# Altium PCB 板3.PcbDoc (part 3 of 3)
Units mm, origin at the board's own origin, x right, y up, seen from the top; angles counter-clockwise.
Board outline 152.4 x 101.6 mm, 4 copper layers (Top Layer, VCC, GND, Bottom Layer); 152 components, 486 nets, 1233 pads, 480 vias.
Unrouted connection lines stored in the file: 1.
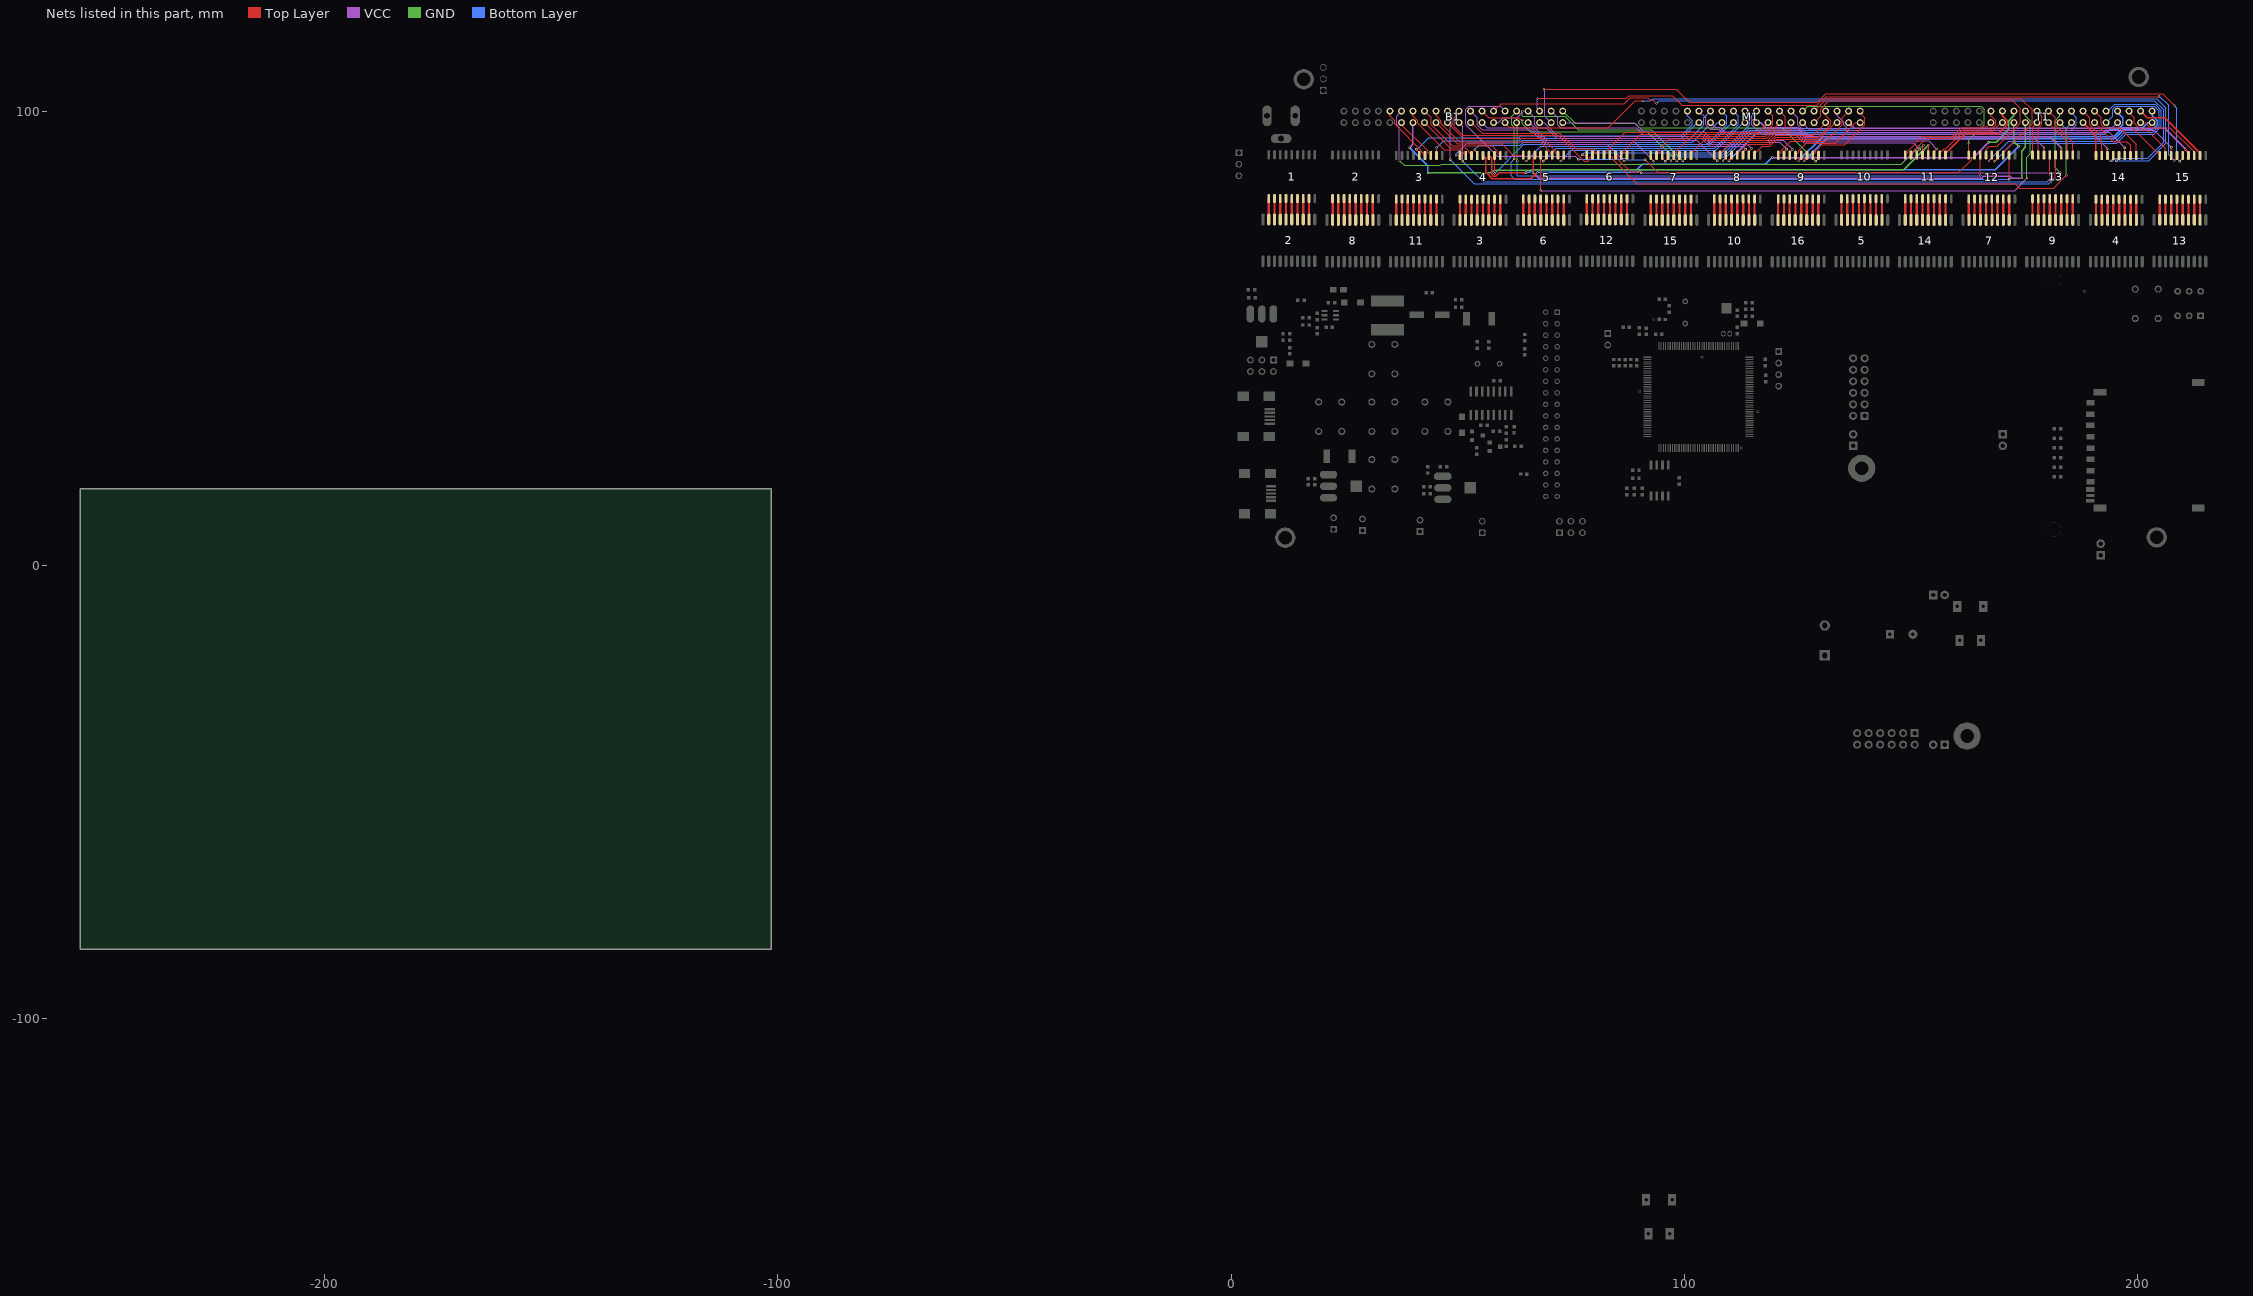
[diagram p5: the nets of this part, all layers, seen from the top]

## Via types
v1: diameter 0.5, hole 0.3, Top Layer to Bottom Layer, 465 vias
v2: diameter 3, hole 3, Top Layer to Bottom Layer, tented both sides, 6 vias
v3: diameter 1.27, hole 1.016, Top Layer to Bottom Layer, 4 vias
v4: diameter 1, hole 1, Top Layer to Bottom Layer, 4 vias
v5: diameter 0.8, hole 0.5, Top Layer to Bottom Layer, 1 vias

## Nets (pads, with @x,y where several pads share a name; then routed paths per layer and width w, separated by ;. In a path a pad name is that pad's centre, name@x,y a point inside that pad or via, vN(x,y) a via of type N, cw(c..) or ccw(c..) an arc to the next point about the centre after c; other vN are vias at no path point) (continued)
W29: 3.14@41.478,90.348 M1.25 | length 68.2
  Top Layer w0.254: v1(40.843,91.669) 41.478,91.034 3.14@41.478,90.348
  Bottom Layer w0.254: v1(40.843,91.669) 41.046,91.669 43.561,94.183 63.37,94.183 63.815,94.628 99.233,94.628 101.716,97.11 101.716,98.012 100.627,99.101 M1.25@100.627,100.101
W30: 3.13@42.748,90.348 B1.25 | length 13
  Top Layer w0.2: B1.25@35.019,100.101 35.019,99.063 36.081,98.001 36.081,97.312 42.083,91.31 42.083,91.013 3.13@42.748,90.348
W31: 3.12@44.018,90.348 B1.6 | length 9.9
  Top Layer w0.254: B1.6@37.559,97.561 37.559,97.142 43.38,91.321 43.38,90.986 3.12@44.018,90.348
W32: 3.11@45.288,90.348 M1.6 | length 61.8
  Top Layer w0.254: 3.11@45.288,90.348 v1(45.288,91.999)
  Bottom Layer w0.254: v1(45.288,91.999) 46.914,93.624 63.453,93.624 64.003,94.174 99.422,94.174 102.809,97.561 M1.6@103.167,97.561
W33: 11.18@148.666,90.424 T1.6 | length 22
  Top Layer w0.254: 11.18@148.666,90.424 149.304,91.062 149.304,91.397 152.459,94.552 159.109,94.552 161.029,96.472 165.467,96.472 165.642,96.647 166.642,96.647 T1.6@167.556,97.561
W34: 11.17@149.936,90.424 T1.26 | length 25.1
  Top Layer w0.254: 11.17@149.936,90.424 150.574,91.062 150.574,91.397 153.275,94.098 159.297,94.098 161.217,96.018 167.553,96.018 168.645,97.11 168.645,98.012 167.556,99.101 T1.26@167.556,100.101
W35: 11.16@151.206,90.424 M1.26 | length 54.6
  Top Layer w0.254: 11.16@151.206,90.424 151.206,91.084 v1(151.841,91.719)
  VCC w0.254: M1.26@103.167,100.101 104.618,98.65 104.618,97.11 105.637,96.091 107.535,96.091 108.562,95.064 124.351,95.064 126.306,93.109 150.452,93.109 v1(151.841,91.719)
W36: 11.15@152.476,90.424 B1.26 | length 131.8
  Top Layer w0.254: 11.15@152.476,90.424 152.476,92.38 v1(152.679,92.583)
  VCC w0.254: v1(37.109,89.129) 37.109,96.471 36.47,97.11 36.47,99.012 B1.26@37.559,100.101
  GND w0.254: v1(37.109,89.129) 38.125,88.113 46.072,88.113 46.395,88.436 147.741,88.436 151.602,92.296 152.393,92.296 v1(152.679,92.583)
W37: 11.14@153.746,90.424 B1.7 | length 128.2
  Top Layer w0.3: 11.14@153.746,90.424 153.746,92.583 v1(153.797,92.634)
  VCC w0.3: v1(39.37,92.05) 40.099,92.778 B1.7@40.099,97.561
  GND w0.3: v1@43.409,86.487 57.394,86.487 58.019,87.112 66.299,87.112 66.35,87.163 68.062,87.163 68.069,87.157 148.32,87.157 v1(153.797,92.634)
  Bottom Layer w0.3: v1(39.37,92.05) 43.409,88.011 v1(43.409,86.462)
W38: 11.13@155.016,90.424 M1.7 | length 53.9
  Top Layer w0.254: 11.13@155.016,90.424 155.016,91.135 v1(155.626,91.745)
  VCC w0.254: M1.7@105.707,97.561 106.723,96.545 107.723,96.545 108.75,95.518 124.539,95.518 126.494,93.563 153.808,93.563 v1(155.626,91.745)
W39: 11.12@156.286,90.424 T1.7 | length 17
  Top Layer w0.254: 11.12@156.286,90.424 156.286,90.759 157.295,91.767 157.629,91.767 161.426,95.564 167.741,95.564 169.738,97.561 T1.7@170.096,97.561
W40: 11.11@157.556,90.424 T1.27 | length 20.1
  Top Layer w0.3: 11.11@157.556,90.424 157.726,90.594 157.726,90.961 161.852,95.087 169.195,95.087 171.208,97.101 171.208,98.022 170.096,99.134 T1.27@170.096,100.101
W41: 4.18@50.47,90.322 M1.27 | length 62.1
  Top Layer w0.254: v1(49.581,90.322) 4.18@50.47,90.322
  Bottom Layer w0.254: v1(49.581,90.322) 49.581,90.576 52.121,93.116 63.587,93.116 64.191,93.72 100.865,93.72 104.256,97.11 104.256,98.65 M1.27@105.707,100.101
W42: 4.17@51.74,90.322 B1.27 | length 16.8
  Top Layer w0.2: B1.27@40.099,100.101 40.099,99.063 41.161,98.001 41.161,97.447 46.969,91.638 50.72,91.638 51.075,91.284 51.075,90.988 4.17@51.74,90.322
W43: 4.16@53.01,90.322 B1.8 | length 13.5
  Top Layer w0.2: B1.8@42.639,97.561 48.162,92.038 51.59,92.038 52.345,91.284 52.345,90.988 4.16@53.01,90.322
W44: 4.15@54.28,90.322 M1.8 | length 58.7
  Top Layer w0.254: v1(53.645,91.592) 54.28,90.957 4.15@54.28,90.322
  Bottom Layer w0.254: v1(53.645,91.592) 54.661,92.608 63.722,92.608 64.379,93.266 101.775,93.266 105.119,96.61 105.256,96.472 106.158,96.472 107.247,97.561 M1.8@108.247,97.561
W45: 4.14@55.55,90.322 T1.8 | length 130.6
  Top Layer w0.3: 4.14@55.55,90.322 56.165,89.707 56.165,86.704 57.634,85.235 66.119,85.235 67.447,86.563 v1(67.488,86.563)
  GND w0.3: T1.8@172.636,97.561 172.636,93.378 v1(173.685,92.329)
  Bottom Layer w0.3: v1(67.488,86.563) 67.513,86.589 89.626,86.589 90.175,87.138 91.018,87.138 91.024,87.132 168.488,87.132 v1(173.685,92.329)
W46: 4.13@56.82,90.322 T1.28 | length 127.5
  Top Layer w0.3: 4.13@56.82,90.322 57.435,89.707 57.435,86.141 57.841,85.735 58.338,85.735 59.116,86.512 v1(64.948,86.512)
  VCC w0.3: v1@119.405,89.865 163.652,89.865 v1(167.056,93.269)
  GND w0.3: v1(167.056,93.269) 168.732,93.269 171.524,96.061 171.524,98.022 172.636,99.134 T1.28@172.636,100.101
  Bottom Layer w0.3: v1(64.948,86.512) 65.1,86.665 65.852,86.665 66.376,87.189 88.213,87.189 88.245,87.157 89.488,87.157 90.688,88.357 117.821,88.357 v1(119.38,89.916)
W47: 4.12@58.09,90.322 M1.28 | length 63.1
  Top Layer w0.254: v1(58.09,86.335) 4.12@58.09,90.322
  Bottom Layer w0.254: v1(58.09,86.335) 64.567,92.812 105.037,92.812 109.336,97.11 109.336,99.012 M1.28@108.247,100.101
W48: 4.11@59.36,90.322 B1.28 | length 21.9
  Top Layer w0.254: B1.28@42.639,100.101 44.09,98.65 44.09,97.11 48.735,92.465 57.551,92.465 58.722,91.295 58.722,90.961 4.11@59.36,90.322
W49: 5.18@64.44,90.399 B1.9 | length 22.2
  Top Layer w0.254: B1.9@45.179,97.561 49.821,92.919 59.637,92.919 62.158,90.399 5.18@64.44,90.399
W50: 5.17@65.71,90.399 M1.9 | length 50.8
  Top Layer w0.254: v1(65.075,89.103) 65.71,89.738 5.17@65.71,90.399
  Bottom Layer w0.254: v1(65.075,89.103) 68.329,92.358 105.226,92.358 110.429,97.561 M1.9@110.787,97.561
W51: 5.16@66.98,90.399 T1.9 | length 125.2
  Top Layer w0.3: v1(66.573,86.538) 66.573,89.992 5.16@66.98,90.399
  VCC w0.3: v1(66.573,86.538) 67.808,85.303 165.501,85.303 165.888,85.69 171.826,85.69 172.172,85.344 v1(174.396,85.344)
  GND w0.3: v1(174.396,85.344) 174.396,91.303 175.176,92.083 T1.9@175.176,97.561
W52: 5.15@68.25,90.399 T1.29 | length 131.7
  Top Layer w0.254: 5.15@68.25,90.399 68.25,82.626 v1(68.301,82.575)
  VCC w0.254: v1(68.301,82.575) 172.774,82.575 175.514,85.315 v1(175.514,85.369)
  GND w0.254: T1.29@175.176,100.101 175.176,99.101 176.265,98.012 176.265,97.11 176.225,97.07 176.225,90.678 175.514,89.967 v1(175.514,85.369)
W53: 5.14@69.52,90.399 M1.29 | length 51.4
  Top Layer w0.254: v1(68.834,89.078) 69.52,89.764 5.14@69.52,90.399
  Bottom Layer w0.254: v1(68.834,89.078) 71.66,91.904 106.669,91.904 111.876,97.11 111.876,99.012 M1.29@110.787,100.101
W54: 5.13@70.79,90.399 B1.29 | length 30.4
  Top Layer w0.2: B1.29@45.179,100.101 45.179,99.063 46.241,98.001 46.241,97.396 50.291,93.346 59.814,93.346 59.816,93.345 68.14,93.345 5.13@70.757,90.729
W55: 5.12@72.06,90.399 B1.10 | length 27.5
  Top Layer w0.254: B1.10@47.719,97.561 51.198,94.082 68.711,94.082 71.422,91.371 71.422,91.037 5.12@72.06,90.399
W56: 5.11@73.33,90.399 M1.10 | length 45.8
  Top Layer w0.254: v1(72.644,89.103) 73.33,89.789 5.11@73.33,90.399
  Bottom Layer w0.254: v1(72.644,89.103) 74.99,91.45 106.858,91.45 112.969,97.561 M1.10@113.327,97.561
W57: 13.18@176.733,90.424 T1.10 | length 7.5
  Top Layer w0.254: 13.18@176.733,90.424 176.733,96.578 T1.10@177.716,97.561
W58: 13.17@178.003,90.424 T1.30 | length 10.5
  Top Layer w0.254: T1.30@177.716,100.101 178.805,99.012 178.805,97.11 178.003,96.308 13.17@178.003,90.424
W59: 13.16@179.273,90.424 M1.30 | length 71.8
  Top Layer w0.254: 13.16@179.273,90.424 v1(179.273,92.024)
  VCC w0.254: M1.30@113.327,100.101 114.778,98.65 114.778,97.11 115.916,95.972 124.727,95.972 126.682,94.017 177.281,94.017 v1(179.273,92.024)
W60: 13.15@180.543,90.424 B1.30 | length 152.3
  Top Layer w0.254: 13.15@180.543,90.424 180.543,86.004 180.746,85.801 v1(180.746,84.48)
  VCC w0.254: B1.30@47.719,100.101 48.808,99.012 48.808,97.11 48.311,96.613 v1(48.311,89.357)
  Bottom Layer w0.254: v1(48.311,89.357) 53.619,84.049 130.553,84.049 130.571,84.067 131.049,84.067 131.067,84.049 180.315,84.049 v1(180.746,84.48)
W61: 13.14@181.813,90.424 B1.11 | length 147.3
  Top Layer w0.254: v1(181.788,85.014) 181.788,86.512 181.813,86.538 13.14@181.813,90.424
  VCC w0.254: B1.11@50.259,97.561 51.054,96.766 v1(51.054,89.078)
  Bottom Layer w0.254: v1(51.054,89.078) 55.629,84.503 130.365,84.503 130.383,84.521 131.237,84.521 131.255,84.503 179.93,84.503 180.732,85.304 181.498,85.304 v1(181.788,85.014)
W62: 13.13@183.083,90.424 M1.11 | length 71.1
  Top Layer w0.3: 13.13@183.083,90.424 v1(183.083,91.973)
  VCC w0.3: M1.11@115.867,97.561 116.834,97.561 117.946,96.449 124.924,96.449 126.88,94.494 180.563,94.494 v1(183.083,91.973)
W63: 13.12@184.353,90.424 T1.11 | length 8.8
  Top Layer w0.254: T1.11@180.256,97.561 184.353,93.464 13.12@184.353,90.424
W64: 13.11@185.623,90.424 T1.31 | length 11.9
  Top Layer w0.254: T1.31@180.256,100.101 181.707,98.65 181.707,97.11 185.623,93.194 13.11@185.623,90.424
W65: 6.18@78.435,90.424 M1.31 | length 44.3
  Top Layer w0.254: v1(77.445,90.475) 77.495,90.424 6.18@78.435,90.424
  Bottom Layer w0.254: v1(77.445,90.475) 77.902,90.932 108.238,90.932 114.416,97.11 114.416,98.65 M1.31@115.867,100.101
W66: 6.17@79.705,90.424 B1.31 | length 38.3
  Top Layer w0.2: B1.31@50.259,100.101 50.259,99.685 49.197,98.623 49.197,96.687 51.116,94.767 72.161,94.767 77.848,89.081
  Top Layer w0.254: 77.848,89.081 78.697,89.081 79.067,89.451 79.067,89.786 6.17@79.705,90.424
W67: 6.16@80.975,90.424 B1.12 | length 31.3
  Top Layer w0.254: B1.12@52.799,97.561 53.061,97.561 55.428,95.194 72.522,95.194 75.949,91.767 79.967,91.767 80.337,91.397 80.337,91.062 6.16@80.975,90.424
W68: 6.15@82.245,90.424 M1.12 | length 39.3
  Top Layer w0.254: 6.15@82.245,90.424 82.883,91.062 82.883,91.397 86.935,95.448 116.294,95.448 M1.12@118.407,97.561
W69: 6.14@83.515,90.424 T1.12 | length 117.3
  Top Layer w0.254: 6.14@83.515,90.424 84.153,89.786 84.153,89.451 89.48,84.125 172.952,84.125 173.942,83.134 181.381,83.134 v1(184.226,85.979)
  GND w0.254: T1.12@182.796,97.561 184.226,96.131 v1(184.226,85.979)
W70: 6.13@84.785,90.424 T1.32 | length 114.4
  Top Layer w0.254: 6.13@84.785,90.424 85.423,89.786 85.423,89.406 88.149,86.68 90.282,86.68 v1(90.424,86.538)
  VCC w0.254: v1(90.424,86.538) 90.449,86.512 v1(182.855,86.512)
  GND w0.254: T1.32@182.796,100.101 182.796,99.101 181.707,98.012 181.707,87.635 182.829,86.512 v1(182.855,86.512)
W71: 6.12@86.055,90.424 M1.32 | length 39.8
  Top Layer w0.2: 6.12@86.055,90.424 86.72,91.089 86.72,91.386 90.356,95.021 117.369,95.021 119.469,97.121 119.469,99.039 M1.32@118.407,100.101
W72: 6.11@87.325,90.424 B1.32 | length 40.9
  Top Layer w0.254: v1(86.665,89.103) 87.325,89.764 6.11@87.325,90.424
  VCC w0.254: B1.32@52.799,100.101 54.25,98.65 54.25,97.11 55.345,96.015 66.119,96.015 69.347,92.786 82.982,92.786 v1(86.665,89.103)
W73: 7.18@92.532,90.348 B1.13 | length 42.9
  Top Layer w0.254: 7.18@92.532,90.348 92.532,89.662 v1(93.167,89.027)
  VCC w0.254: B1.13@55.339,97.561 56.431,96.469 66.307,96.469 69.535,93.24 88.954,93.24 v1(93.167,89.027)
W74: 7.17@93.802,90.348 M1.13 | length 30.5
  Top Layer w0.254: 7.17@93.802,90.348 94.44,90.986 94.44,91.691 96.749,93.999 100.287,93.999 100.826,94.539 117.925,94.539 M1.13@120.947,97.561
W75: 7.16@95.072,90.348 T1.13 | length 94.7
  Top Layer w0.254: 7.16@95.072,90.348 95.072,89.687 v1(95.707,89.052)
  Bottom Layer w0.254: v1(95.707,89.052) 97.133,90.478 108.426,90.478 114.316,96.368 184.142,96.368 T1.13@185.336,97.561
W76: 7.15@96.342,90.348 T1.33 | length 97.6
  Top Layer w0.254: 7.15@96.342,90.348 96.342,89.84 v1(97.003,89.179)
  Bottom Layer w0.254: v1(97.003,89.179) 97.847,90.024 108.614,90.024 114.504,95.914 185.228,95.914 186.425,97.11 186.425,98.65 185.336,99.739 T1.33@185.336,100.101
W77: 7.14@97.612,90.348 M1.33 | length 31.9
  Top Layer w0.254: 7.14@97.612,90.348 98.25,90.986 98.25,91.321 101.014,94.085 118.113,94.085 119.76,95.733 122.174,95.733 122.174,98.874 M1.33@120.947,100.101
W78: 7.13@98.882,90.348 B1.33 | length 49.4
  Top Layer w0.254: B1.33@55.339,100.101 56.79,98.65 63.41,98.65 63.889,98.171 v1(64.186,98.171) ; v1(98.247,89.129) 98.882,89.764 7.13@98.882,90.348
  GND w0.254: v1(64.186,98.171) 64.186,97.334 65.956,95.564 91.812,95.564 v1(98.247,89.129)
W79: 7.12@100.152,90.348 B1.14 | length 49.5
  Top Layer w0.254: v1(99.568,89.129) 100.152,89.713 7.12@100.152,90.348
  VCC w0.254: B1.14@57.879,97.561 58.879,97.561 59.968,98.65 63.048,98.65 64.237,99.839 v1(64.237,100.076)
  GND w0.254: v1(64.237,100.076) 64.237,99.035 64.287,98.984 73.594,98.984 76.56,96.018 92.678,96.018 v1(99.568,89.129)
W80: 7.11@101.422,90.348 M1.14 | length 26.1
  Top Layer w0.254: 7.11@101.422,90.348 101.615,90.541 101.615,90.876 104.37,93.631 118.301,93.631 119.895,95.225 122.657,95.225 123.487,96.055 M1.14@123.487,97.561
W81: 14.18@190.729,90.322 T1.14 | length 8.4
  Top Layer w0.3: T1.14@187.876,97.561 190.729,94.709 14.18@190.729,90.322
W82: 14.17@191.999,90.322 T1.34 | length 11.5
  Top Layer w0.254: T1.34@187.876,100.101 189.327,98.65 189.327,97.11 191.999,94.439 14.17@191.999,90.322
W83: 14.16@193.269,90.322 M1.34 | length 75.6
  Top Layer w0.254: 14.16@193.269,90.322 v1@193.269,91.796
  VCC w0.254: M1.34@123.487,100.101 124.938,98.65 124.938,97.11 127.078,94.971 190.144,94.971 v1(193.294,91.821)
W84: 14.15@194.539,90.322 B1.34 | length 172.7
  Top Layer w0.254: B1.34@57.879,100.101 59.555,101.778 86.708,101.778 87.996,103.066 91.922,103.066 92.517,102.471 93.109,102.471 v1(93.802,101.778) ; v1(193.929,89.103) 194.539,89.713 14.15@194.539,90.322
  Bottom Layer w0.254: v1(93.802,101.778) 94.455,102.431 203.61,102.431 205.656,100.385 205.656,93.242 205.027,92.613 205.027,92.589 202.169,89.731 194.96,89.731 194.332,89.103 v1(193.929,89.103)
W85: 14.14@195.809,90.322 B1.15 | length 171.5
  Top Layer w0.254: B1.15@60.419,97.561 61.384,96.596 62.384,96.596 62.508,96.472 83.18,96.472 89.07,102.362 v1(90.848,102.362) ; v1(195.199,89.154) 195.809,89.764 14.14@195.809,90.322
  Bottom Layer w0.254: v1(90.848,102.362) 92.405,102.362 92.928,102.885 204.117,102.885 206.164,100.838 206.164,92.982 202.336,89.154 v1(195.199,89.154)
W86: 14.13@197.079,90.322 M1.15 | length 75.1
  Top Layer w0.254: 14.13@197.079,90.322 197.079,91.973 v1(197.104,91.999)
  VCC w0.254: M1.15@126.027,97.561 127.322,96.266 135.3,96.266 136.141,95.425 193.678,95.425 v1(197.104,91.999)
W87: 14.12@198.349,90.322 T1.15 | length 12.3
  Top Layer w0.254: T1.15@190.416,97.561 194.581,93.396 197.536,93.396 198.349,92.583 14.12@198.349,90.322
W88: 14.11@199.619,90.322 T1.35 | length 15.6
  Top Layer w0.254: T1.35@190.416,100.101 191.867,98.65 191.867,97.11 192.505,96.472 195.958,96.472 199.619,92.812 14.11@199.619,90.322
W89: 12.18@162.687,90.399 M1.35 | length 52.4
  Top Layer w0.254: 12.18@162.687,90.399 v1(162.687,93.066)
  GND w0.254: M1.35@126.027,100.101 127.116,101.19 165.467,101.19 166.105,100.552 166.105,97.11 162.687,93.692 v1(162.687,93.066)
W90: 12.17@163.957,90.399 B1.35 | length 131.4
  Top Layer w0.254: v1(91.326,89.37) 94.082,86.614 160.507,86.614 163.319,89.426 163.319,89.76 12.17@163.957,90.399
  VCC w0.254: B1.35@60.419,100.101 59.33,101.19 52.348,101.19 51.71,100.552 51.71,97.11 58.657,90.163 75.877,90.163 v1(76.53,89.51)
  Bottom Layer w0.254: v1(76.53,89.51) 86.255,89.51 86.426,89.68 86.904,89.68 87.214,89.37 v1(91.326,89.37)
W91: 12.16@165.227,90.399 B1.16 | length 118.3
  Top Layer w0.254: v1@165.227,85.903 12.16@165.227,90.399
  GND w0.254: B1.16@62.959,97.561 63.144,97.376 v1(63.144,89.154)
  Bottom Layer w0.254: v1(63.144,89.154) 63.144,85.903 v1(165.252,85.903)
W92: 12.15@166.497,90.399 M1.16 | length 63.5
  Top Layer w0.254: M1.16@128.567,97.561 130.018,99.012 130.018,100.552 131.828,102.362 172.39,102.362 174.015,100.736 174.015,97.401 168.969,92.354 167.183,92.354 166.497,91.669 12.15@166.497,90.399
W93: 12.14@167.767,90.399 T1.16 | length 60.1
  Top Layer w0.254: v1(167.132,89.129) 167.767,89.764 12.14@167.767,90.399
  Bottom Layer w0.254: v1(167.132,89.129) 171.509,93.506 195.102,93.506 197.068,95.472 203.274,95.472 204.705,96.903 204.705,100.052 203.567,101.19 195.045,101.19 194.407,100.552 194.407,99.012 T1.16@192.956,97.561
W94: 12.13@169.037,90.399 T1.36 | length 58.5
  Top Layer w0.254: v1(168.377,89.078) 169.037,89.738 12.13@169.037,90.399
  Bottom Layer w0.254: v1(168.377,89.078) 172.35,93.052 195.29,93.052 197.256,95.018 203.462,95.018 205.159,96.715 205.159,100.24 203.755,101.644 194.857,101.644 193.314,100.101 T1.36@192.956,100.101
W95: 12.12@170.307,90.399 M1.36 | length 62.8
  Top Layer w0.254: M1.36@128.567,100.101 131.336,102.87 174.149,102.87 176.627,100.392 176.627,97.354 170.307,91.034 12.12@170.307,90.399
W96: 12.11@171.577,90.399 B1.36 | length 130.7
  Top Layer w0.254: v1(171.577,85.09) 12.11@171.577,90.399
  GND w0.254: v1(62.433,89.586) 62.433,96.547 61.87,97.11 61.87,99.012 B1.36@62.959,100.101
  Bottom Layer w0.254: v1(62.433,89.586) 61.722,88.875 61.722,85.827 62.459,85.09 v1(171.577,85.09)
W97: 8.18@106.553,90.399 B1.17 | length 46.7
  Top Layer w0.254: 8.18@106.553,90.399 106.553,89.789 v1(107.188,89.154)
  VCC w0.254: B1.17@65.499,97.561 65.857,97.561 69.723,93.694 102.648,93.694 v1(107.188,89.154)
W98: 8.17@107.823,90.399 M1.17 | length 26.4
  Top Layer w0.2: 8.17@107.823,90.399 108.217,90.793 108.217,91.089 110.332,93.204 118.478,93.204 120.067,94.793 128.339,94.793 M1.17@131.107,97.561
W99: 8.16@109.093,90.399 T1.17 | length 92
  Top Layer w0.254: v1(108.458,89.154) 109.093,89.789 8.16@109.093,90.399
  Bottom Layer w0.254: v1(108.458,89.154) 114.764,95.46 192.394,95.46 193.455,96.52 194.455,96.52 T1.17@195.496,97.561
W100: 8.15@110.363,90.399 T1.37 | length 95.2
  Top Layer w0.3: v1(109.728,89.129) 110.363,89.764 8.15@110.363,90.399
  Bottom Layer w0.3: v1(109.728,89.129) 115.582,94.983 192.592,94.983 193.652,96.043 195.55,96.043 196.608,97.101 196.608,98.673 195.496,99.785 T1.37@195.496,100.101
W101: 8.14@111.633,90.399 M1.37 | length 27
  Top Layer w0.254: 8.14@111.633,90.399 111.93,90.696 111.93,91.031 113.676,92.777 118.654,92.777 120.243,94.366 129.452,94.366 132.196,97.11 132.196,98.012 131.107,99.101 M1.37@131.107,100.101
W102: 8.13@112.903,90.399 B1.37 | length 54
  Top Layer w0.254: 8.13@112.903,90.399 112.903,91.11 v1(113.513,91.719)
  VCC w0.254: B1.37@65.499,100.101 66.95,98.65 66.95,97.11 67.588,96.472 69.486,96.472 71.809,94.148 103.727,94.148 105.536,92.34 112.892,92.34 v1(113.513,91.719)
W103: 8.12@114.173,90.399 B1.18 | length 50.8
  Top Layer w0.254: 8.12@114.173,90.399 114.173,91.211 v1(114.808,91.846)
  VCC w0.254: B1.18@68.039,97.561 69.039,97.561 71.998,94.602 103.915,94.602 105.724,92.794 113.86,92.794 v1(114.808,91.846)
W104: 8.11@115.443,90.399 M1.18 | length 21.3
  Top Layer w0.2: 8.11@115.443,90.399 115.663,90.619 115.663,90.915 117.098,92.35 118.831,92.35 120.411,93.929 129.619,93.929 133.251,97.561 M1.18@133.647,97.561
W105: 15.18@204.775,90.322 T1.18 | length 10
  Top Layer w0.254: T1.18@198.036,97.561 198.036,97.061 15.18@204.775,90.322
W106: 15.17@206.045,90.322 T1.38 | length 13.9
  Top Layer w0.254: T1.38@198.036,100.101 198.036,99.739 199.125,98.65 199.125,97.472 200.577,96.02 201.922,96.02 206.045,91.897 15.17@206.045,90.322
W107: 15.16@207.315,90.322 M1.38 | length 79.7
  Top Layer w0.254: 15.16@207.315,90.322 207.315,92.1 v1(207.34,92.126)
  VCC w0.254: M1.38@133.647,100.101 133.647,99.101 135.098,97.65 135.098,97.11 136.33,95.879 203.587,95.879 v1(207.34,92.126)
W108: 15.15@208.585,90.322 B1.38 | length 159.2
  Top Layer w0.254: v1(67.539,102.895) 87.184,102.895 87.808,103.52 97.31,103.52 99.484,101.346 129.17,101.346 131.148,103.324 v1@204.64,103.324 ; v1(208.001,89.205) 208.585,89.789 15.15@208.585,90.322
  VCC w0.254: v1(67.539,102.895) 67.539,100.601 B1.38@68.039,100.101
  Bottom Layer w0.254: v1(67.539,102.895) v1@67.582,102.852 ; v1@204.513,103.251 204.851,103.251 206.756,101.346 206.756,90.449 v1@208.026,89.179
  other v1: 204.64,103.378
W109: 15.14@209.855,90.322 B1.19 | length 164.2
  Top Layer w0.254: v1(69.004,104.902) 98.214,104.902 101.008,102.108 129.29,102.108 131.083,103.901 195.58,103.901 195.634,103.955 205.417,103.955 v1(208.026,101.346) ; v1(209.22,89.052) 209.855,89.687 15.14@209.855,90.322
  VCC w0.254: v1@69.134,104.772 69.134,99.006 B1.19@70.579,97.561
  Bottom Layer w0.254: v1@207.917,101.371 208.534,100.754 208.534,89.738 v1(209.22,89.052)
W110: 15.13@211.125,90.322 M1.19 | length 78.4
  Top Layer w0.3: v1(210.439,91.643) 211.125,90.957 15.13@211.125,90.322
  VCC w0.3: M1.19@136.187,97.561 137.393,96.356 205.915,96.356 210.439,91.831 v1(210.439,91.643)
W111: 15.12@212.395,90.322 T1.19 | length 15.3
  Top Layer w0.254: T1.19@200.576,97.561 201.576,97.561 202.665,96.472 207.058,96.472 212.395,91.135 15.12@212.395,90.322
W112: 15.11@213.665,90.322 T1.39 | length 17.5
  Top Layer w0.3: T1.39@200.576,100.101 202.004,98.673 205.873,98.673 213.665,90.881 15.11@213.665,90.322
W113: 9.18@120.65,90.373 M1.39 | length 20.7
  Top Layer w0.254: 9.18@120.65,90.373 121.288,91.011 121.288,91.346 123.44,93.497 131.123,93.497 134.736,97.11 134.736,98.65 M1.39@136.187,100.101
W114: 9.17@121.92,90.373 B1.39 | length 57.9
  Top Layer w0.254: 9.17@121.92,90.373 121.92,91.059 v1(122.555,91.694)
  VCC w0.254: B1.39@70.579,100.101 72.03,98.65 72.03,97.11 72.668,96.472 89.374,96.472 90.79,95.056 104.104,95.056 105.912,93.248 121.001,93.248 v1(122.555,91.694)
W115: 9.16@123.19,90.373 B1.20 | length 54.7
  Top Layer w0.254: 9.16@123.19,90.373 123.19,90.983 v1(123.85,91.643)
  VCC w0.254: B1.20@73.119,97.561 88.927,97.561 90.978,95.51 104.292,95.51 106.1,93.702 121.791,93.702 v1(123.85,91.643)
W116: 9.15@124.46,90.373 M1.20 | length 17.4
  Top Layer w0.2: 9.15@124.46,90.373 125.125,91.038 125.125,91.335 126.861,93.07 133.198,93.07 137.689,97.561 M1.20@138.727,97.561
W117: 9.14@125.73,90.373 T1.20 | length 83
  Top Layer w0.3: v1(125.12,89.129) 125.73,89.738 9.14@125.73,90.373
  Bottom Layer w0.3: v1(125.12,89.129) 130.474,94.483 194.697,94.483 196.664,96.449 201.037,96.449 202.149,97.561 T1.20@203.116,97.561
W118: 9.13@127,90.373 T1.40 | length 86.2
  Top Layer w0.3: v1(126.34,89.129) 127,89.789 9.13@127,90.373
  Bottom Layer w0.3: v1(126.34,89.129) 131.194,93.983 194.904,93.983 196.871,95.949 203.077,95.949 204.228,97.101 204.228,98.022 203.116,99.134 T1.40@203.116,100.101
W119: 9.12@128.27,90.373 M1.40 | length 17.9
  Top Layer w0.2: 9.12@128.27,90.373 128.935,91.038 128.935,91.335 130.234,92.634 135.301,92.634 139.789,97.121 139.789,98.623 138.727,99.685 M1.40@138.727,100.101
W120: 9.11@129.54,90.373 B1.40 | length 61.9
  Top Layer w0.254: v1(128.905,89.078) 129.54,89.713 9.11@129.54,90.373
  GND w0.254: B1.40@73.119,100.101 75.836,97.384 89.105,97.384 90.016,96.472 121.511,96.472 v1(128.905,89.078)
XIN: 
XOUT: 
XQ1: 1.1 2.19 | length 4.6
  Top Layer w0.5: 2.19@8.28,76.203 1.1@8.28,80.823
XQ2: 1.2 2.18@9.55,76.203 | length 4.6
  Top Layer w0.5: 2.18@9.55,76.203 1.2@9.55,80.823
XQ3: 1.3 2.17@10.82,76.203 | length 4.6
  Top Layer w0.5: 2.17@10.82,76.203 1.3@10.82,80.823
XQ4: 1.4 2.16@12.09,76.203 | length 4.6
  Top Layer w0.5: 2.16@12.09,76.203 1.4@12.09,80.823
XQ5: 1.5 2.15@13.36,76.203 | length 4.6
  Top Layer w0.5: 2.15@13.36,76.203 1.5@13.36,80.823
XQ6: 1.6 2.14@14.63,76.203 | length 4.6
  Top Layer w0.5: 2.14@14.63,76.203 1.6@14.63,80.823
XQ7: 1.7 2.13@15.9,76.203 | length 4.6
  Top Layer w0.5: 2.13@15.9,76.203 1.7@15.9,80.823
XQ8: 1.8 2.12@17.17,76.203 | length 4.6
  Top Layer w0.5: 2.12@17.17,76.203 1.8@17.17,80.823
XQ9: 5.19 10.1@134.595,80.772 | length 4.7
  Top Layer w0.5: 10.1@134.595,80.772 134.595,76.14 5.19@134.634,76.101
XQ10: 5.18@135.904,76.101 10.2@135.865,80.772 | length 4.6
  Top Layer w0.5: 5.18@135.904,76.101 10.2@135.904,80.733
XQ11: 5.17@137.174,76.101 10.3@137.135,80.772 | length 4.6
  Top Layer w0.5: 5.17@137.135,76.14 10.3@137.135,80.772
XQ12: 5.16@138.444,76.101 10.4@138.405,80.772 | length 4.6
  Top Layer w0.5: 5.16@138.444,76.101 10.4@138.444,80.733
XQ13: 5.15@139.714,76.101 10.5@139.675,80.772 | length 4.6
  Top Layer w0.5: 5.15@139.675,76.14 10.5@139.675,80.772
XQ14: 5.14@140.984,76.101 10.6@140.945,80.772 | length 4.6
  Top Layer w0.5: 5.14@140.984,76.101 10.6@140.984,80.733
XQ15: 5.13@142.254,76.101 10.7@142.215,80.772 | length 4.6
  Top Layer w0.5: 5.13@142.215,76.14 10.7@142.215,80.772
XQ16: 5.12@143.524,76.101 10.8@143.485,80.772 | length 4.6
  Top Layer w0.5: 5.12@143.524,76.101 10.8@143.524,80.733
XQ17: 2.1@22.352,80.797 8.19 | length 4.7
  Top Layer w0.5: 2.1@22.352,80.797 22.38,80.769 8.19@22.38,76.101
XQ18: 2.2@23.622,80.797 8.18@23.65,76.101 | length 4.7
  Top Layer w0.5: 2.2@23.622,80.797 23.622,76.129 8.18@23.65,76.101
XQ19: 2.3@24.892,80.797 8.17@24.92,76.101 | length 4.7
  Top Layer w0.5: 8.17@24.92,76.101 2.3@24.92,80.769
XQ20: 2.4@26.162,80.797 8.16@26.19,76.101 | length 4.7
  Top Layer w0.5: 2.4@26.162,80.797 26.162,76.129 8.16@26.19,76.101
XQ21: 2.5@27.432,80.797 8.15@27.46,76.101 | length 4.7
  Top Layer w0.5: 2.5@27.432,80.797 27.46,80.769 8.15@27.46,76.101
XQ22: 2.6@28.702,80.797 8.14@28.73,76.101 | length 4.7
  Top Layer w0.5: 2.6@28.702,80.797 28.702,76.129 8.14@28.73,76.101
XQ23: 2.7@29.972,80.797 8.13@30,76.101 | length 4.7
  Top Layer w0.5: 8.13@29.972,76.129 2.7@29.972,80.797
XQ24: 2.8@31.242,80.797 8.12@31.27,76.101 | length 4.7
  Top Layer w0.5: 8.12@31.242,76.129 2.8@31.242,80.797
XQ25: 3.1@36.398,80.696 11.19 | length 4.6
  Top Layer w0.5: 11.19@36.398,76.115 3.1@36.398,80.696
XQ26: 3.2@37.668,80.696 11.18@37.682,76.101 | length 4.6
  Top Layer w0.5: 11.18@37.682,76.101 3.2@37.682,80.682
XQ27: 3.3@38.938,80.696 11.17@38.952,76.101 | length 4.6
  Top Layer w0.5: 11.17@38.938,76.115 3.3@38.938,80.696
XQ28: 3.4@40.208,80.696 11.16@40.222,76.101 | length 4.6
  Top Layer w0.5: 11.16@40.222,76.101 3.4@40.222,80.682
XQ29: 3.5@41.478,80.696 11.15@41.492,76.101 | length 4.6
  Top Layer w0.5: 3.5@41.478,80.696 41.478,76.115 11.15@41.492,76.101
XQ30: 3.6@42.748,80.696 11.14@42.762,76.101 | length 4.6
  Top Layer w0.5: 11.14@42.762,76.101 3.6@42.762,80.682
XQ31: 3.7@44.018,80.696 11.13@44.032,76.101 | length 4.6
  Top Layer w0.5: 11.13@44.018,76.115 3.7@44.018,80.696
XQ32: 3.8@45.288,80.696 11.12@45.302,76.101 | length 4.6
  Top Layer w0.5: 11.12@45.302,76.101 3.8@45.302,80.682
XQ33: 11.1@148.666,80.772 14.19 | length 4.7
  Top Layer w0.5: 14.19@148.666,76.101 11.1@148.666,80.772
XQ34: 11.2@149.936,80.772 14.18@149.936,76.101 | length 4.7
  Top Layer w0.5: 14.18@149.936,76.101 11.2@149.936,80.772
XQ35: 11.3@151.206,80.772 14.17@151.206,76.101 | length 4.7
  Top Layer w0.5: 14.17@151.206,76.101 11.3@151.206,80.772
XQ36: 11.4@152.476,80.772 14.16@152.476,76.101 | length 4.7
  Top Layer w0.5: 14.16@152.476,76.101 11.4@152.476,80.772
XQ37: 11.5@153.746,80.772 14.15@153.746,76.101 | length 4.7
  Top Layer w0.5: 14.15@153.746,76.101 11.5@153.746,80.772
XQ38: 11.6@155.016,80.772 14.14@155.016,76.101 | length 4.7
  Top Layer w0.5: 14.14@155.016,76.101 11.6@155.016,80.772
XQ39: 11.7@156.286,80.772 14.13@156.286,76.101 | length 4.7
  Top Layer w0.5: 14.13@156.286,76.101 11.7@156.286,80.772
XQ40: 11.8@157.556,80.772 14.12@157.556,76.101 | length 4.7
  Top Layer w0.5: 14.12@157.556,76.101 11.8@157.556,80.772
XQ41: 3.19 4.1@50.47,80.67 | length 4.5
  Top Layer w0.5: 3.19@50.47,76.127 4.1@50.47,80.67
XQ42: 3.18@51.714,76.101 4.2@51.74,80.67 | length 4.5
  Top Layer w0.5: 3.18@51.714,76.101 4.2@51.714,80.644
XQ43: 3.17@52.984,76.101 4.3@53.01,80.67 | length 4.5
  Top Layer w0.5: 3.17@53.01,76.127 4.3@53.01,80.67
XQ44: 3.16@54.254,76.101 4.4@54.28,80.67 | length 4.5
  Top Layer w0.5: 3.16@54.254,76.101 4.4@54.254,80.644
XQ45: 3.15@55.524,76.101 4.5@55.55,80.67 | length 4.5
  Top Layer w0.5: 3.15@55.55,76.127 4.5@55.55,80.67
XQ46: 3.14@56.794,76.101 4.6@56.82,80.67 | length 4.5
  Top Layer w0.5: 3.14@56.794,76.101 4.6@56.794,80.644
XQ47: 3.13@58.064,76.101 4.7@58.09,80.67 | length 4.5
  Top Layer w0.5: 3.13@58.09,76.127 4.7@58.09,80.67
XQ48: 3.12@59.334,76.101 4.8@59.36,80.67 | length 4.5
  Top Layer w0.5: 3.12@59.36,76.127 4.8@59.36,80.67
XQ49: 5.1@64.44,80.747 6.19 | length 4.6
  Top Layer w0.5: 6.19@64.44,76.137 5.1@64.44,80.747
XQ50: 5.2@65.71,80.747 6.18@65.746,76.101 | length 4.6
  Top Layer w0.5: 6.18@65.746,76.101 5.2@65.746,80.711
XQ51: 5.3@66.98,80.747 6.17@67.016,76.101 | length 4.6
  Top Layer w0.5: 6.17@66.98,76.137 5.3@66.98,80.747
XQ52: 5.4@68.25,80.747 6.16@68.286,76.101 | length 4.6
  Top Layer w0.5: 6.16@68.286,76.101 5.4@68.286,80.711
XQ53: 5.5@69.52,80.747 6.15@69.556,76.101 | length 4.7
  Top Layer w0.5: 5.5@69.52,80.747 69.52,76.137 6.15@69.556,76.101
XQ54: 5.6@70.79,80.747 6.14@70.826,76.101 | length 4.6
  Top Layer w0.5: 6.14@70.826,76.101 5.6@70.826,80.711
XQ55: 5.7@72.06,80.747 6.13@72.096,76.101 | length 4.6
  Top Layer w0.5: 6.13@72.06,76.137 5.7@72.06,80.747
XQ56: 5.8@73.33,80.747 6.12@73.366,76.101 | length 4.6
  Top Layer w0.5: 6.12@73.366,76.101 5.8@73.366,80.711
XQ57: 9.19 13.1@176.733,80.772 | length 4.7
  Top Layer w0.5: 9.19@176.729,76.101 13.1@176.729,80.768
XQ58: 9.18@177.999,76.101 13.2@178.003,80.772 | length 4.7
  Top Layer w0.5: 9.18@178.003,76.105 13.2@178.003,80.772
XQ59: 9.17@179.269,76.101 13.3@179.273,80.772 | length 4.7
  Top Layer w0.5: 9.17@179.269,76.101 13.3@179.269,80.768
XQ60: 9.16@180.539,76.101 13.4@180.543,80.772 | length 4.7
  Top Layer w0.5: 9.16@180.543,76.105 13.4@180.543,80.772
XQ61: 9.15@181.809,76.101 13.5@181.813,80.772 | length 4.7
  Top Layer w0.5: 9.15@181.809,76.101 13.5@181.809,80.768
XQ62: 9.14@183.079,76.101 13.6@183.083,80.772 | length 4.7
  Top Layer w0.5: 9.14@183.083,76.105 13.6@183.083,80.772
XQ63: 9.13@184.349,76.101 13.7@184.353,80.772 | length 4.7
  Top Layer w0.5: 9.13@184.349,76.101 13.7@184.349,80.768
XQ64: 9.12@185.619,76.101 13.8@185.623,80.772 | length 4.7
  Top Layer w0.5: 9.12@185.623,76.105 13.8@185.623,80.772
XQ65: 6.1@78.435,80.772 12.19 | length 4.5
  Top Layer w0.5: 12.19@78.435,76.228 6.1@78.435,80.772
XQ66: 6.2@79.705,80.772 12.18@79.68,76.203 | length 4.5
  Top Layer w0.5: 12.18@79.68,76.203 6.2@79.68,80.747
XQ67: 6.3@80.975,80.772 12.17@80.95,76.203 | length 4.5
  Top Layer w0.5: 12.17@80.975,76.228 6.3@80.975,80.772
XQ68: 6.4@82.245,80.772 12.16@82.22,76.203 | length 4.5
  Top Layer w0.5: 12.16@82.22,76.203 6.4@82.22,80.747
XQ69: 6.5@83.515,80.772 12.15@83.49,76.203 | length 4.5
  Top Layer w0.5: 6.5@83.515,80.772 83.566,80.772 12.15@83.566,76.279
XQ70: 6.6@84.785,80.772 12.14@84.76,76.203 | length 4.5
  Top Layer w0.5: 12.14@84.76,76.203 6.6@84.76,80.747
XQ71: 6.7@86.055,80.772 12.13@86.03,76.203 | length 4.5
  Top Layer w0.5: 12.13@86.055,76.228 6.7@86.055,80.772
XQ72: 6.8@87.325,80.772 12.12@87.3,76.203 | length 4.5
  Top Layer w0.5: 12.12@87.3,76.203 6.8@87.3,80.747
XQ73: 7.1@92.532,80.696 15.19 | length 4.6
  Top Layer w0.5: 15.19@92.532,76.108 7.1@92.532,80.696
XQ74: 7.2@93.802,80.696 15.18@93.809,76.101 | length 4.6
  Top Layer w0.5: 15.18@93.809,76.101 7.2@93.809,80.689
XQ75: 7.3@95.072,80.696 15.17@95.079,76.101 | length 4.6
  Top Layer w0.5: 7.3@95.072,80.696 95.072,76.108 15.17@95.079,76.101
XQ76: 7.4@96.342,80.696 15.16@96.349,76.101 | length 4.6
  Top Layer w0.5: 15.16@96.349,76.101 7.4@96.349,80.689
XQ77: 7.5@97.612,80.696 15.15@97.619,76.101 | length 4.6
  Top Layer w0.5: 15.15@97.612,76.108 7.5@97.612,80.696
XQ78: 7.6@98.882,80.696 15.14@98.889,76.101 | length 4.6
  Top Layer w0.5: 15.14@98.889,76.101 7.6@98.889,80.689
XQ79: 7.7@100.152,80.696 15.13@100.159,76.101 | length 4.6
  Top Layer w0.5: 15.13@100.152,76.108 7.7@100.152,80.696
XQ80: 7.8@101.422,80.696 15.12@101.429,76.101 | length 4.6
  Top Layer w0.5: 15.12@101.429,76.101 7.8@101.429,80.689
XQ81: 4.19 14.1@190.729,80.67 | length 4.5
  Top Layer w0.5: 4.19@190.761,76.101 14.1@190.761,80.638
XQ82: 4.18@192.031,76.101 14.2@191.999,80.67 | length 4.5
  Top Layer w0.5: 4.18@191.999,76.133 14.2@191.999,80.67
XQ83: 4.17@193.301,76.101 14.3@193.269,80.67 | length 4.5
  Top Layer w0.5: 4.17@193.301,76.101 14.3@193.301,80.638
XQ84: 4.16@194.571,76.101 14.4@194.539,80.67 | length 4.5
  Top Layer w0.5: 4.16@194.539,76.133 14.4@194.539,80.67
XQ85: 4.15@195.841,76.101 14.5@195.809,80.67 | length 4.5
  Top Layer w0.5: 4.15@195.841,76.101 14.5@195.841,80.638
XQ86: 4.14@197.111,76.101 14.6@197.079,80.67 | length 4.5
  Top Layer w0.5: 4.14@197.079,76.133 14.6@197.079,80.67
XQ87: 4.13@198.381,76.101 14.7@198.349,80.67 | length 4.5
  Top Layer w0.5: 4.13@198.381,76.101 14.7@198.381,80.638
XQ88: 4.12@199.651,76.101 14.8@199.619,80.67 | length 4.5
  Top Layer w0.5: 4.12@199.619,76.133 14.8@199.619,80.67
XQ89: 7.19 12.1@162.687,80.747 | length 4.6
  Top Layer w0.5: 7.19@162.697,76.101 12.1@162.697,80.736
XQ90: 7.18@163.968,76.101 12.2@163.957,80.747 | length 4.6
  Top Layer w0.5: 7.18@163.957,76.112 12.2@163.957,80.747
XQ91: 7.17@165.237,76.101 12.3@165.227,80.747 | length 4.6
  Top Layer w0.5: 7.17@165.237,76.101 12.3@165.237,80.736
XQ92: 7.16@166.507,76.101 12.4@166.497,80.747 | length 4.6
  Top Layer w0.5: 7.16@166.497,76.111 12.4@166.497,80.747
XQ93: 7.15@167.777,76.101 12.5@167.767,80.747 | length 4.6
  Top Layer w0.5: 7.15@167.777,76.101 12.5@167.777,80.736
XQ94: 7.14@169.047,76.101 12.6@169.037,80.747 | length 4.6
  Top Layer w0.5: 7.14@169.037,76.111 12.6@169.037,80.747
XQ95: 7.13@170.317,76.101 12.7@170.307,80.747 | length 4.6
  Top Layer w0.5: 7.13@170.307,76.111 12.7@170.307,80.747
XQ96: 7.12@171.587,76.101 12.8@171.577,80.747 | length 4.6
  Top Layer w0.5: 7.12@171.587,76.101 12.8@171.587,80.736
XQ97: 8.1@106.553,80.747 10.19 | length 4.6
  Top Layer w0.5: 10.19@106.553,76.118 8.1@106.553,80.747
XQ98: 8.2@107.823,80.747 10.18@107.841,76.101 | length 4.6
  Top Layer w0.5: 10.18@107.841,76.101 8.2@107.841,80.729
XQ99: 8.3@109.093,80.747 10.17@109.111,76.101 | length 4.6
  Top Layer w0.5: 10.17@109.093,76.118 8.3@109.093,80.747
XQ100: 8.4@110.363,80.747 10.16@110.381,76.101 | length 4.6
  Top Layer w0.5: 10.16@110.381,76.101 8.4@110.381,80.729
XQ101: 8.5@111.633,80.747 10.15@111.651,76.101 | length 4.6
  Top Layer w0.5: 10.15@111.633,76.118 8.5@111.633,80.747
XQ102: 8.6@112.903,80.747 10.14@112.921,76.101 | length 4.6
  Top Layer w0.5: 10.14@112.921,76.101 8.6@112.921,80.729
XQ103: 8.7@114.173,80.747 10.13@114.191,76.101 | length 4.6
  Top Layer w0.5: 10.13@114.191,76.101 8.7@114.191,80.729
XQ104: 8.8@115.443,80.747 10.12@115.461,76.101 | length 4.6
  Top Layer w0.5: 10.12@115.443,76.118 8.8@115.443,80.747
XQ105: 13.19 15.1@204.775,80.67 | length 4.5
  Top Layer w0.5: 13.19@204.8,76.126 15.1@204.8,80.645
XQ106: 13.18@206.07,76.126 15.2@206.045,80.67 | length 4.5
  Top Layer w0.5: 13.18@206.045,76.152 15.2@206.045,80.67
XQ107: 13.17@207.34,76.126 15.3@207.315,80.67 | length 4.5
  Top Layer w0.5: 13.17@207.34,76.126 15.3@207.34,80.645
XQ108: 13.16@208.61,76.126 15.4@208.585,80.67 | length 4.5
  Top Layer w0.5: 13.16@208.585,76.152 15.4@208.585,80.67
XQ109: 13.15@209.88,76.126 15.5@209.855,80.67 | length 4.5
  Top Layer w0.5: 13.15@209.88,76.126 15.5@209.88,80.645
XQ110: 13.14@211.15,76.126 15.6@211.125,80.67 | length 4.5
  Top Layer w0.5: 13.14@211.125,76.152 15.6@211.125,80.67
XQ111: 13.13@212.42,76.126 15.7@212.395,80.67 | length 4.5
  Top Layer w0.5: 13.13@212.42,76.126 15.7@212.42,80.645
XQ112: 13.12@213.69,76.126 15.8@213.665,80.67 | length 4.5
  Top Layer w0.5: 13.12@213.665,76.152 15.8@213.665,80.67
XQ113: 9.1@120.65,80.721 16.19 | length 4.6
  Top Layer w0.5: 16.19@120.602,76.101 9.1@120.602,80.673
XQ114: 9.2@121.92,80.721 16.18 | length 4.6
  Top Layer w0.5: 16.18@121.92,76.149 9.2@121.92,80.721
XQ115: 9.3@123.19,80.721 16.17 | length 4.6
  Top Layer w0.5: 16.17@123.142,76.101 9.3@123.142,80.673
XQ116: 9.4@124.46,80.721 16.16 | length 4.6
  Top Layer w0.5: 16.16@124.46,76.149 9.4@124.46,80.721
XQ117: 9.5@125.73,80.721 16.15 | length 4.6
  Top Layer w0.5: 16.15@125.73,76.149 9.5@125.73,80.721
XQ118: 9.6@127,80.721 16.14 | length 4.6
  Top Layer w0.5: 16.14@126.952,76.101 9.6@126.952,80.673
XQ119: 9.7@128.27,80.721 16.13 | length 4.6
  Top Layer w0.5: 16.13@128.27,76.149 9.7@128.27,80.721
XQ120: 9.8@129.54,80.721 16.12 | length 4.6
  Top Layer w0.5: 16.12@129.492,76.101 9.8@129.492,80.673
XQVCC2: 
pads on no net: DC_IN.3 Designator141. Designator141.32 J1.10 J1.11 J1.12 J1_1.2 J1_1.3 J1_1.4 J1_2.2 J1_2.3 J1_2.4 K1.1 K1.4 P2.1 P2.2 P2.3 P2.4 P2.5 P2.6 P2.11 P2.12 P2_1.1 P2_1.2 P2_1.3 P2_1.4 P2_1.5 P2_1.6 P2_1.7 P2_1.8 P2_1.9 P2_1.10 P2_1.11 P2_1.12 P3.1 P3.2 P4.1 P4.2 S1.1 S1.2 U1.106 U5.9 U5.10 U5.11 U5.12 U5.15 USB_1.4 USB_1.6 USB_1.7 USB_1.8 USB_1.9 USB_1.MH1 USB_1.MH2 USB_2.4 USB_2.6 USB_2.7 USB_2.8 USB_2.9 USB_2.MH1 USB_2.MH2 Y1. Y1_1.1 Y1_1.2
copper on no net:
  other v1: 99.212,56.337 51.638,74.092 36.982,74.168 56.896,74.168 41.123,74.193
  other v2: 10.922,-10.414 10.668,-7.62 19.05,-6.604 13.97,-5.588 202.235,22.428 202.336,33.122
  other v3: 92.024,-143.408 96.723,-143.408 160.655,-12.573 165.354,-12.573
  other v4: 92.024,-143.408 96.723,-143.408 160.655,-12.573 165.354,-12.573

## Keep-outs
Keep-Out Layer:
  circle w0.254: c211.328,57.658 r1.545
  lines w0.2: 0,4.996 0,103.76 ; 4.996,0 210.99,0 ; 215.99,5 216.07,5 216.07,103.76
  lines w0.254: 0,5 cw(c0,0) 5,0 ; 0,103.76 ccw(c0,111.76) 8,111.76 102.692,111.76 ccw(c107.692,111.76) 112.692,111.76 208.07,111.76 ccw(c216.07,111.76) 216.07,103.76 ; 134.239,-42.926 165.989,-42.926 ccw(c165.989,-41.656) 167.259,-41.656 167.259,-6.35 ccw(c165.989,-6.35) 165.989,-5.08 130.175,-5.08 ccw(c130.175,-6.35) 128.905,-6.35 128.905,-41.656 ccw(c130.175,-41.656) 130.175,-42.926 134.493,-42.926 ; 209.804,57.404 ccw(c211.455,57.785) 209.848,57.249 ; 211.07,0 cw(c216.07,0) 216.07,5

## Silkscreen, mask and mechanical layers (free items; w line width, h text height)
Top Overlay:
  text "6" at 21.692,99.619 h1.52
  text "5" at 87.655,99.314 h1.52
  text "4" at 151.562,98.781 h1.52
  text "2" at 87.706,96.698 h1.52
  text "1" at 22.225,96.52 h1.52
  text "3" at 151.638,96.418 h1.52
  text "DC-IN" at 1.186,93.218 h1.02
  text "GND" at 0.678,82.804 h2.02
  text "PA2" at 84.074,50.546 h1.52
  text "PA3" at 84.074,48.006 h1.52
  text "3.3" at 122.428,46.482 h1.52
  text "SDA" at 134.239,46.482 h0.64 r270
  text "RST" at 141.732,46.482 h0.64 r270
  text "5V" at 1.186,44.704 h2.02
  text "JTMS" at 122.174,44.196 h1.52
  text "SCL" at 134.239,44.069 h0.64 r270
  text "RDY" at 141.732,43.942 h0.64 r270
  text "GND" at 0,41.91 h2.02
  text "JTCK" at 122.174,41.402 h1.52
  text "GND" at 134.239,41.275 h0.64 r270
  text "CS" at 141.732,40.767 h0.64 r270
  text "CLK" at 141.732,38.989 h0.64 r270
  text "GND" at 122.174,38.862 h1.52
  text "RXD" at 134.239,38.735 h0.64 r270
  text "MISO" at 141.732,36.576 h0.64 r270
  text "TXD" at 134.239,36.195 h0.64 r270
  text "3V3" at 134.239,33.655 h0.64 r270
  text "K2" at 16.764,30.48 h2.02
  text "K1" at 40.386,30.48 h2.02
  text "3V3" at 134.62,29.845 h0.64 r270
  text "BOOT0" at 62.738,27.178 h0.8
  text "GND" at 134.62,26.924 h0.64 r270
  text "BOOT1" at 70.866,18.796 h0.8
  text "B1" at 74.168,11.176 h2.02
  text "K2" at 19.05,10.16 h2.02
  text "5V" at 30.734,9.652 h1.52
  text "3.3V" at 42.926,9.652 h1.52
  text "K1" at 57.404,9.398 h2.02
  text "GND" at 30.734,6.858 h1.52
  text "GND" at 42.926,6.858 h1.52
  text "B0" at 74.422,4.572 h2.02
  text "Speak" at 157.734,-8.382 h0.76 r180
  text "RST" at 137.16,-35.052 h0.64
  text "RDY" at 139.7,-35.052 h0.64
  text "CS" at 142.875,-35.052 h0.64
  text "CLK" at 144.653,-35.052 h0.64
  text "MISO" at 147.066,-35.052 h0.64
  text "3V3" at 153.797,-42.164 h0.64
  text "GND" at 156.718,-42.164 h0.64
  text "SDA" at 137.16,-42.545 h0.64
  text "SCL" at 139.573,-42.545 h0.64
  text "GND" at 142.367,-42.545 h0.64
  text "RXD" at 144.907,-42.545 h0.64
  text "TXD" at 147.447,-42.545 h0.64
  text "3V3" at 149.987,-42.545 h0.64
Bottom Overlay:
  lines w0.178: 141.006,34.961 141.006,42.382 ; 141.26,-33.377 141.26,-35.778 148.681,-35.778 ; 158.877,-18.034 158.877,-5.334 162.687,-5.334 166.243,-5.334 ; 159.004,-18.161 166.497,-18.161 ; 162.687,0.381 174.244,0.381 174.498,0.381 ; 166.116,-5.334 166.497,-5.334 167.005,-5.842 167.005,-6.096 167.005,-17.653
  text "GND" at 4.488,100.076 h1.02
  text "IN" at 15.918,99.822 h2.02
  text "Speaker" at 163.449,-8.001 h1.02 r90
  text "R3 R6 9600bps" at 145.542,-29.21 h1.02 r270
  text "R4 R6 4800bps" at 147.574,-29.21 h1.02 r270
  text "UART BAND RATE SETTING:" at 150.495,-33.528 h0.76 r270

## Text inside footprints (layer, text, board x,y; h text height)
Designator141: Bottom Overlay "D14" at 67.801,33.73 h0.71 r90; Bottom Overlay "RS" at 67.801,56.23 h0.71 r90; Bottom Overlay "CS" at 74.187,56.263 h0.71 r90; Bottom Overlay "WR" at 74.187,53.723 h0.71 r90; Bottom Overlay "RST" at 74.187,51.564 h0.71 r90; Bottom Overlay "D1" at 74.187,48.516 h0.71 r90; Bottom Overlay "D2" at 67.801,48.605 h0.71 r90; Bottom Overlay "D3" at 74.187,46.103 h0.71 r90; Bottom Overlay "D4" at 67.801,46.105 h0.71 r90; Bottom Overlay "D5" at 74.187,43.563 h0.71 r90; Bottom Overlay "D6" at 67.801,43.48 h0.71 r90; Bottom Overlay "D8" at 67.801,41.355 h0.71 r90; Bottom Overlay "D9" at 74.187,38.61 h0.71 r90; Bottom Overlay "D12" at 67.801,36.23 h0.71 r90; Bottom Overlay "D15" at 74.187,31.117 h0.71 r90; Bottom Overlay "VDD" at 74.187,26.164 h0.71 r90; Bottom Overlay "VDD" at 67.801,23.605 h0.71 r90; Bottom Overlay "GND" at 67.801,26.23 h0.71 r90; Bottom Overlay "VDD" at 67.801,28.73 h0.71 r90; Bottom Overlay "D10" at 67.801,38.855 h0.71 r90; Bottom Overlay "D0" at 67.801,51.105 h0.71 r90; Bottom Overlay "RD" at 67.801,53.73 h0.71 r90; Bottom Overlay "GND" at 67.801,31.23 h0.71 r90; Bottom Overlay "GND" at 74.187,23.751 h0.71 r90; Bottom Overlay "D11" at 74.187,36.197 h0.71 r90; Bottom Overlay "PEN" at 74.187,18.544 h0.71 r90; Bottom Overlay "CLK" at 67.801,16.105 h0.71 r90; Bottom Overlay "MOSI" at 67.801,21.355 h0.71 r90; Bottom Overlay "MO" at 67.801,18.105 h0.71 r90; Bottom Overlay "TCS" at 74.187,16.004 h0.71 r90; Bottom Overlay "MISO" at 74.187,21.465 h0.71 r90; Bottom Overlay "BL" at 74.187,28.196 h0.71 r90; Bottom Overlay "D14" at 67.807,33.728 h0.71 r90; Bottom Overlay "RS" at 67.807,56.228 h0.71 r90; Bottom Overlay "CS" at 74.193,56.261 h0.71 r90; Bottom Overlay "WR" at 74.193,53.721 h0.71 r90; Bottom Overlay "RST" at 74.193,51.562 h0.71 r90; Bottom Overlay "D1" at 74.193,48.514 h0.71 r90; Bottom Overlay "D2" at 67.807,48.603 h0.71 r90; Bottom Overlay "D3" at 74.193,46.101 h0.71 r90; Bottom Overlay "D4" at 67.807,46.103 h0.71 r90; Bottom Overlay "D5" at 74.193,43.561 h0.71 r90; Bottom Overlay "D6" at 67.807,43.478 h0.71 r90; Bottom Overlay "D8" at 67.807,41.353 h0.71 r90; Bottom Overlay "D9" at 74.193,38.608 h0.71 r90; Bottom Overlay "D13" at 74.203,33.728 h0.71 r90; Bottom Overlay "D12" at 67.807,36.228 h0.71 r90; Bottom Overlay "D15" at 74.193,31.115 h0.71 r90; Bottom Overlay "VDD" at 74.193,26.162 h0.71 r90; Bottom Overlay "VDD" at 67.807,23.603 h0.71 r90; Bottom Overlay "GND" at 67.807,26.228 h0.71 r90; Bottom Overlay "VDD" at 67.807,28.728 h0.71 r90; Bottom Overlay "D10" at 67.807,38.853 h0.71 r90; Bottom Overlay "D0" at 67.807,51.103 h0.71 r90; Bottom Overlay "RD" at 67.807,53.728 h0.71 r90; Bottom Overlay "GND" at 67.807,31.228 h0.71 r90; Bottom Overlay "GND" at 74.193,23.749 h0.71 r90; Bottom Overlay "D11" at 74.193,36.195 h0.71 r90; Bottom Overlay "PEN" at 74.193,18.542 h0.71 r90; Bottom Overlay "CLK" at 67.807,16.103 h0.71 r90; Bottom Overlay "MOSI" at 67.807,21.353 h0.71 r90; Bottom Overlay "MO" at 67.807,18.103 h0.71 r90; Bottom Overlay "TCS" at 74.193,16.002 h0.71 r90; Bottom Overlay "MISO" at 74.193,21.463 h0.71 r90; Bottom Overlay "BL" at 74.193,28.194 h0.71 r90; Bottom Overlay "D7" at 74.193,41.402 h0.71 r90
Designator178: Top Overlay "G" at 80.772,8.128 h1.27 r90; Top Overlay "3.3" at 70.104,6.858 h1.27 r90
U2: Top Overlay "1" at 25.856,20.066 h1 r270; Top Overlay "3" at 25.856,15.494 h1 r270
U4: Top Overlay "1" at 51.078,19.71 h1 r270; Top Overlay "3" at 50.571,15.165 h1 r270
U7: Top Overlay "1" at 9.466,50.979 h1 r180; Top Overlay "3" at 4.894,50.979 h1 r180